# Altium PCB IMU_Board_CG_Rev1c.PcbDoc
Units mil, origin at the board's own origin, x right, y up, seen from the top; angles counter-clockwise.
Board outline 3000 x 2000 mil, 2 copper layers (Top Layer, Bottom Layer); 63 components, 39 nets, 221 pads, 67 vias.
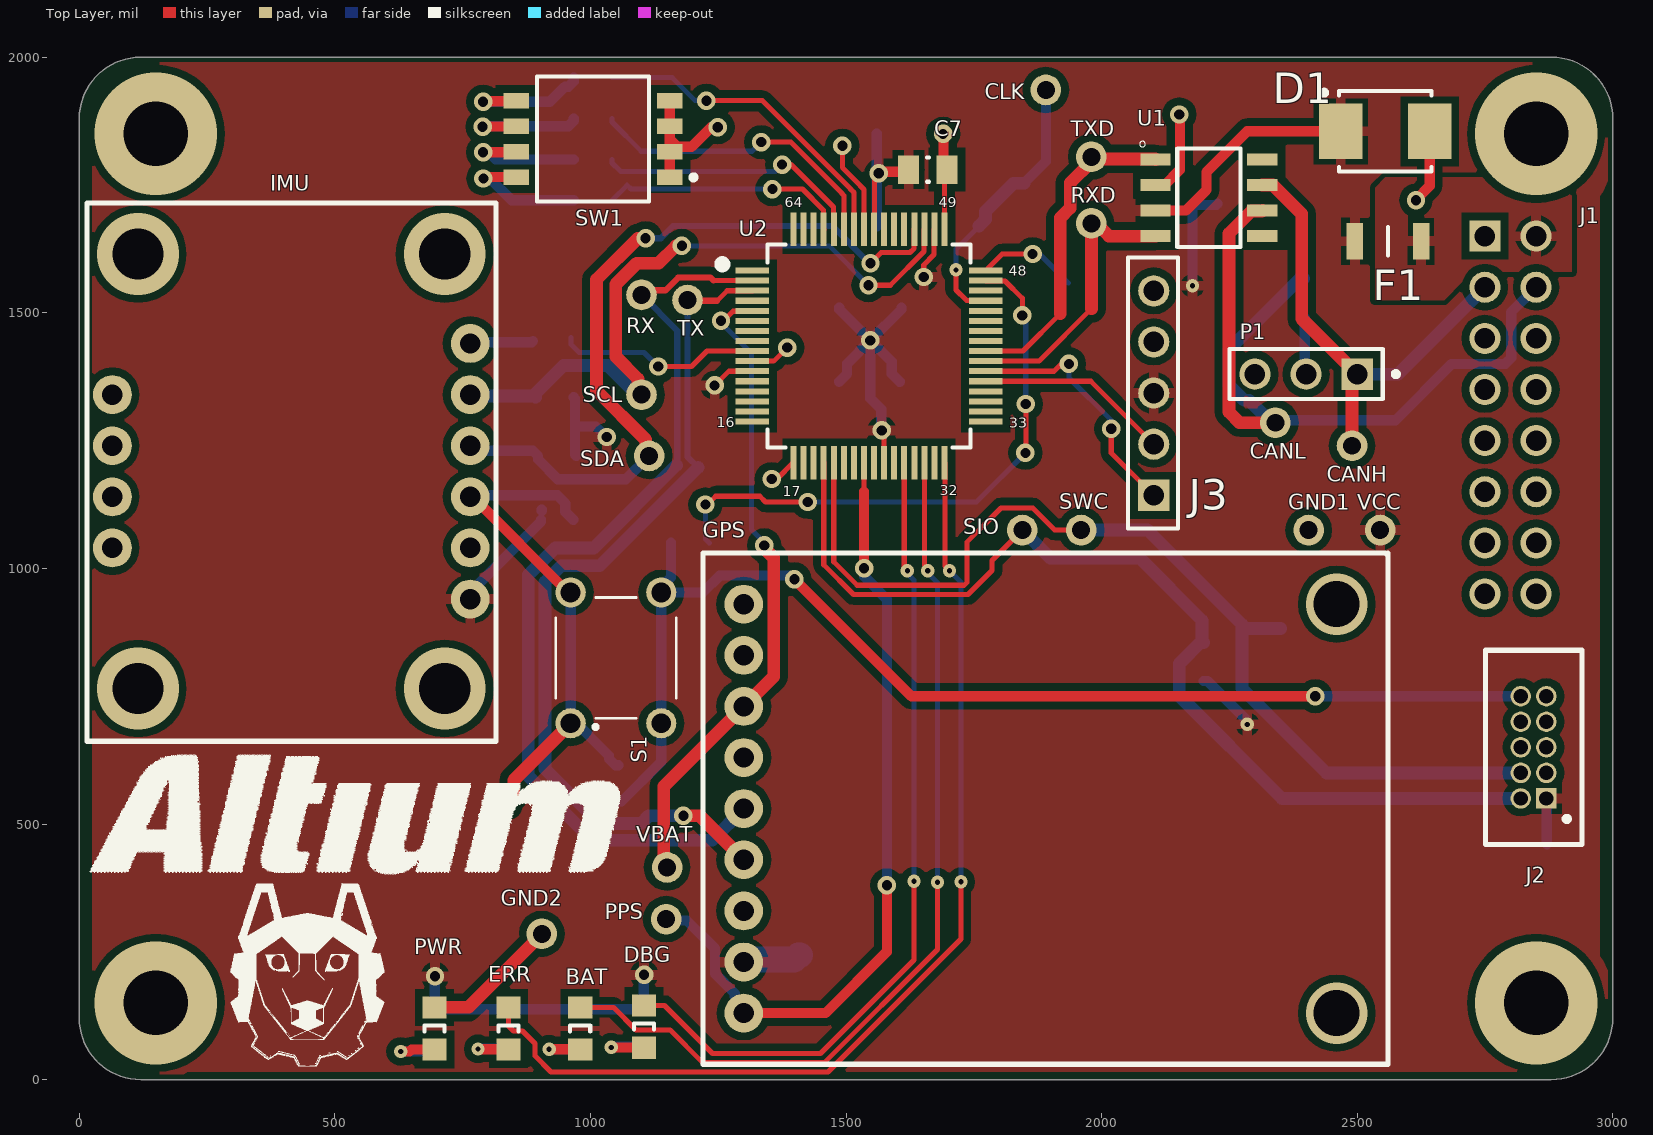
[diagram p0: Top Layer view]
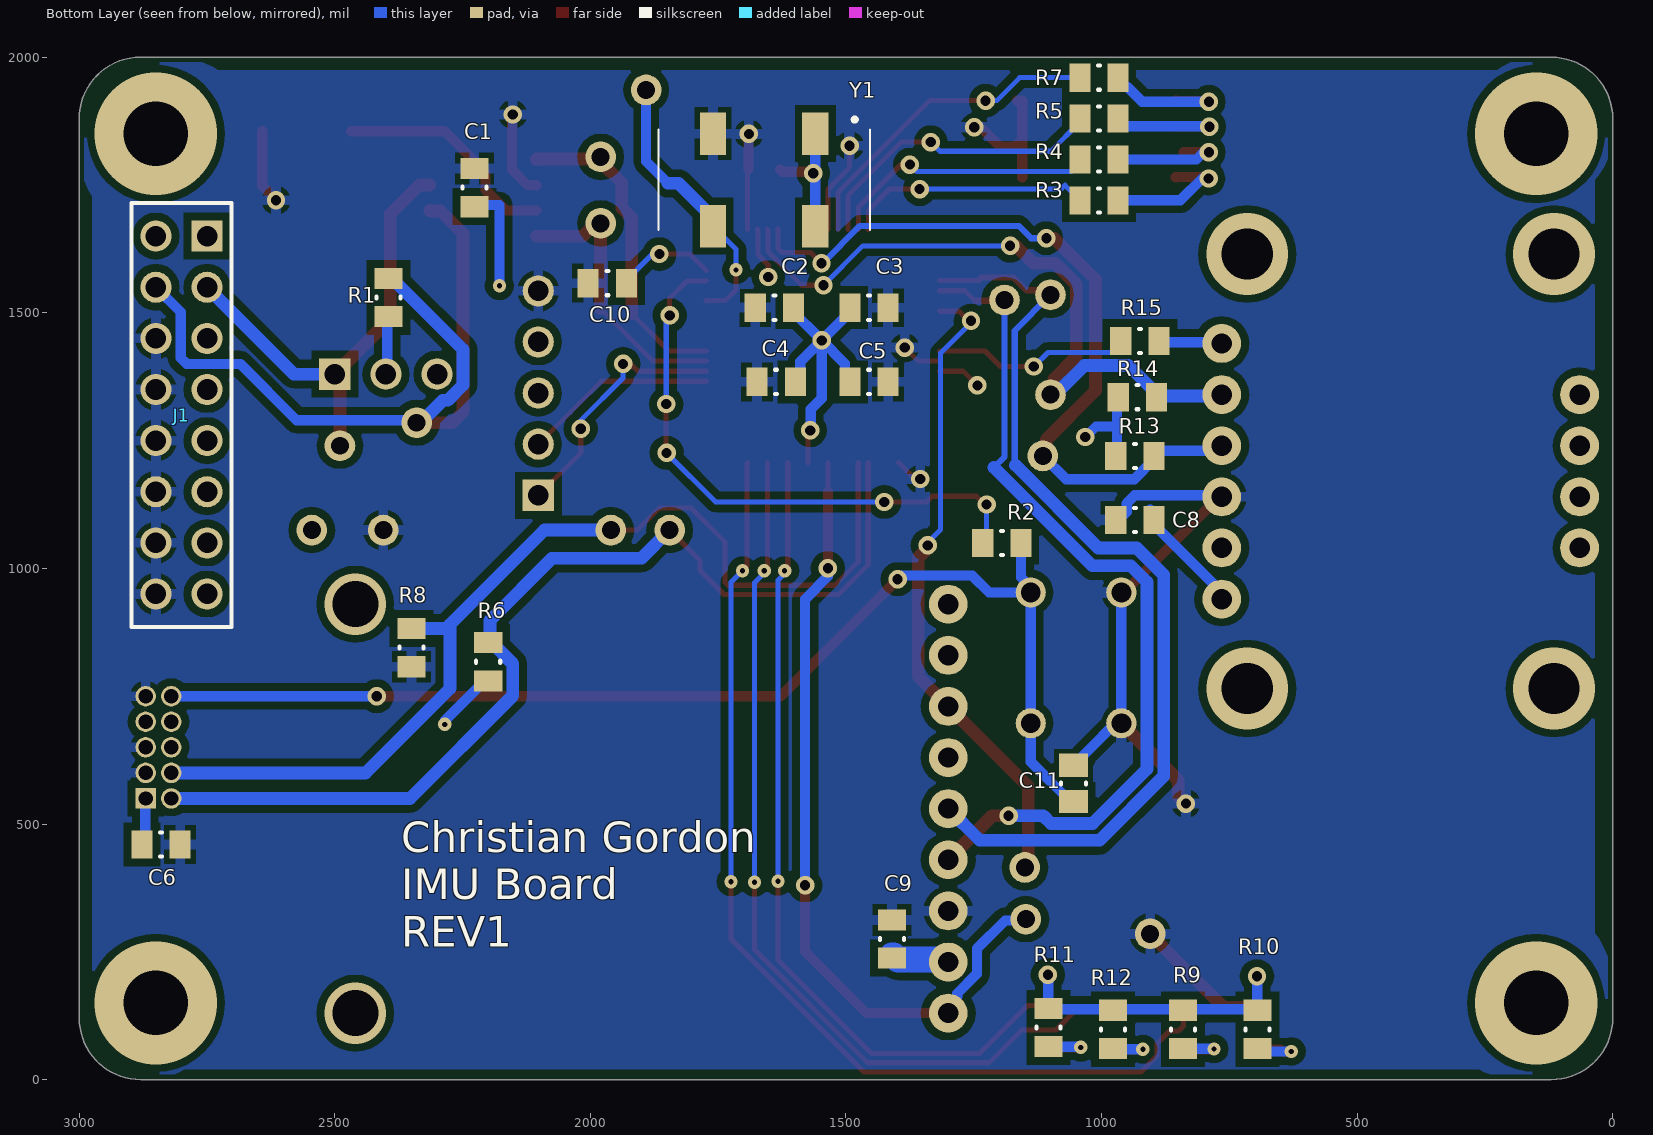
[diagram p1: Bottom Layer view, seen from below]
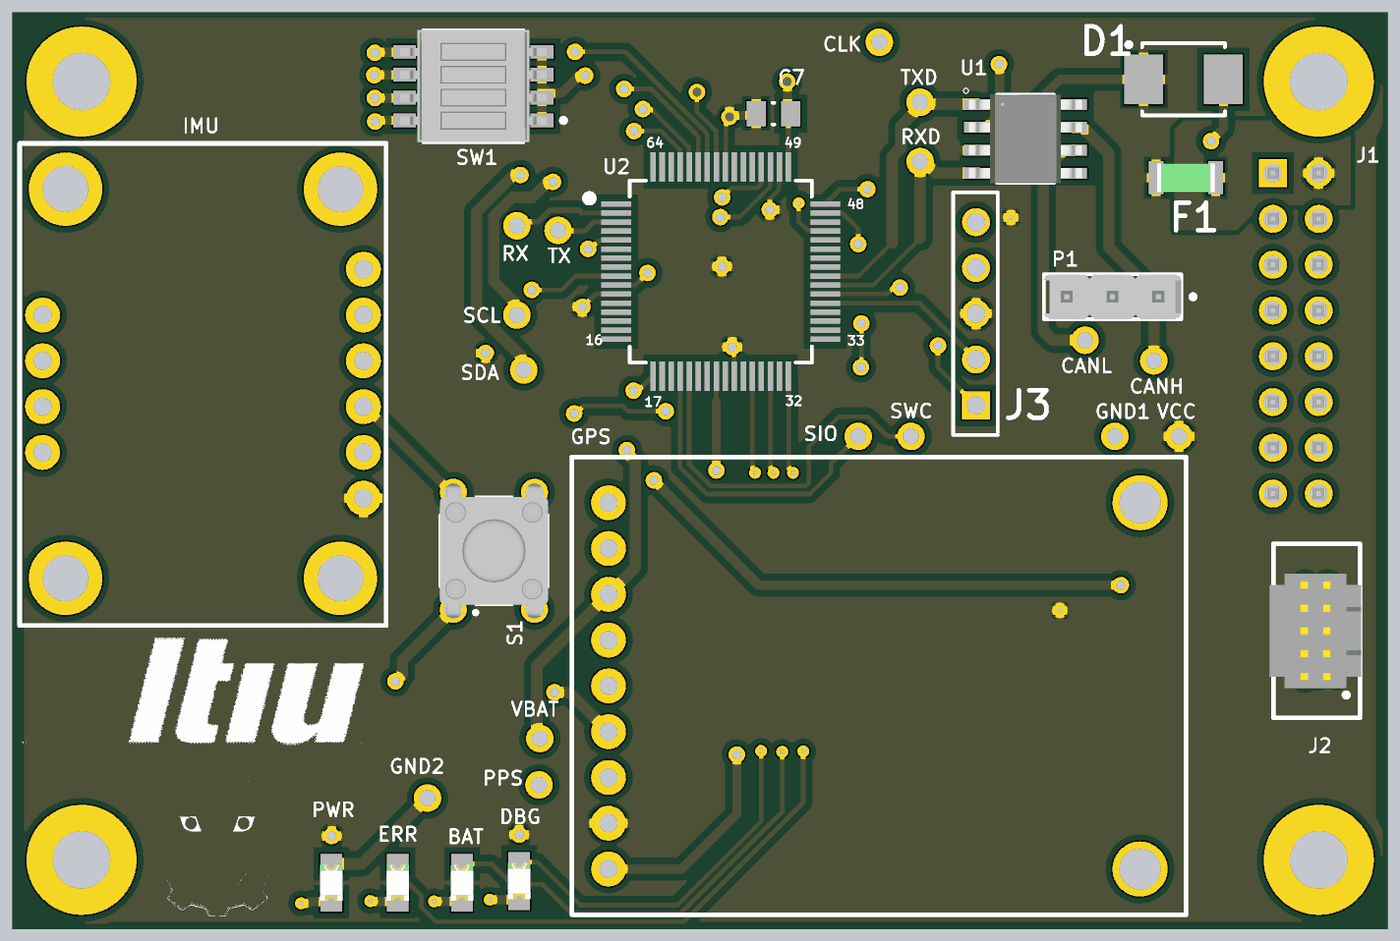
[diagram p2: 3D render of the assembled board from above, using the file's embedded part models]

## Layer stack, top to bottom
Top Solder: solder mask 0.4, Solder Resist, Dk 3.5
Top Layer: signal copper 1.4
Dielectric 1: dielectric 12.6, FR-4, Dk 4.8
Bottom Layer: signal copper 1.4
Bottom Solder: solder mask 0.4, Solder Resist, Dk 3.5

## Board outline
120,0 2880,0 ccw(c2880,120) 3000,120 3000,1880 ccw(c2880,1880) 2880,2000 120,2000 ccw(c120,1880) 0,1880 0,120 ccw(c120,120)

## Design rules (kind name [scope] priority, off if disabled: settings)
BoardOutlineClearance [All] p1: gap=10 ignorepadtopadclearanceinfootprint=FALSE
Clearance [All] p1: gap=5 ignorepadtopadclearanceinfootprint=TRUE except(0: Arc-Hole Track-Hole SMDPad-Hole THPad-Hole Via-Hole Fill-Hole Poly-Hole Region-Hole Text-Hole; 8: Track-Track Track-SMDPad Track-THPad Track-Via; 10: Poly-Poly; 15: Arc-Poly Track-Poly SMDPad-Poly THPad-Poly Via-Poly Fill-Poly)
ComponentClearance [All] p1: gap=0 collisioncheckmode=3 verticalgap=100000 showdistances=FALSE
Height [All] p1: minheight=0 maxheight=2000 prefheight=500
HoleSize [All] p1: absolutevalues=TRUE maxlimit=200 minlimit=10 maxpercent=80.000 minpercent=20.000
MinimumAnnularRing [All] p1: minimumring=6
MinimumSolderMaskSliver [All] p1: minsoldermaskwidth=5
PlaneConnect [All] p1: planeconnectstyle=Relief reliefexpansion=20 reliefentries=4 reliefconductorwidth=20 reliefairgap=10
PolygonConnect [All] p1: connectstyle=Relief reliefconductorwidth=20 reliefentries=4 polygonreliefangle="90 Angle" airgapwidth=10
RoutingVias [All] p1: holewidth=10 width=25 viastyle="Through Hole" minholewidth=10 minwidth=25 maxholewidth=28 maxwidth=50
SilkToSolderMaskClearance [IsPad] p1: minsilkscreentomaskgap=5 clearancetoexposedcopper=TRUE
SolderMaskExpansion [All] p1: expansion=4 istentingtop=FALSE
Width [All] p1: maxlimit=200 minlimit=5 preferedwidth=25 minimp=50.000000 maximp=50.000000 favimp=50.000000
24 further rules are at their usual default settings.

## Classes and differential pairs
component class IMU_Board_MC_CG: BAT C1 C2 C3 C4 C5 C6 C7 C10 C11 CANH CANL CLK D1 DBG ERR F1 GND1 GND2 J1 J2 J3 P1 PWR R1 R2 R3 R4 R5 R6 R7 R8 R9 R10 R11 R12 RXD S1 SIO SW1 SWC TXD U1 U2 VCC Y1
component class IMU_Board_IMU_CG: C8 C9 GPS IMU PPS R13 R14 R15 RX SCL SDA TX VBAT

## Components (designator, comment, footprint, x,y, rotation, side; value= is the part's Value field where it differs from the comment)
1 "Screw Hole" "Screw Hole" 150,150 r90 top
2 "Screw Hole" "Screw Hole" 150,1850 r90 top
3 "Screw Hole" "Screw Hole" 2850,1850 r90 top
4 "Screw Hole" "Screw Hole" 2850,150 r90 top
BAT "LED" 0805_A 980,100 r270 top
C1 "Capacitor 0805" "CAP 0805" 2227,1745 r270 bottom
C2 "Capacitor 0805" "CAP 0805" 1640.12,1510 r0 bottom
C3 "Capacitor 0805" "CAP 0805" 1455.12,1510 r180 bottom
C4 "Capacitor 0805" "CAP 0805" 1636.5,1365 r0 bottom
C5 "Capacitor 0805" "CAP 0805" 1455,1365 r180 bottom
C6 "Capacitor 0805" "CAP 0805" 2840,460 r0 bottom
C7 "Capacitor 0805" "CAP 0805" 1660,1780 r180 top
C8 "Capacitor 0805" "CAP 0805" 935,1095 r180 bottom
C9 "Capacitor 0805" "CAP 0805" 1410,275 r270 bottom
C10 "Capacitor 0805" "CAP 0805" 1967,1558 r0 bottom
C11 ".1uF" CAPC0805(2012)130_N 1055,579.57 r90 bottom value=390pF
CANH "Test Point" "Test Point Through-hole" 2515,1220 r90 top
CANL "Test Point" "Test Point Through-hole" 2365,1265 r90 top
CLK "Test Point" "Test Point Through-hole" 1916,1916 r90 top
D1 "3v3 One" ONSC-SMB-2-403A-03_H_V 2555,1855 r0 top
DBG "LED" 0805_A 1105,103.66 r270 top
ERR "LED" 0805_A 840,100 r270 top
F1 "MF-NSMF012-2" FUSC3216X110N 2560,1640 r180 top
GND1 "Test Point" "Test Point Through-hole" 2430,1055 r90 top
GND2 "Test Point" "Test Point Through-hole" 930,265 r90 top
GPS "MTK3339 Breakout" "MTK3339 Breakout" 1220,1030 r270 top
IMU "BNO055 Breakout" "BNO055 Breakout" 815,660 r90 top
J1 "Stacking Header" SMTC-SSQ-108-02-X-D 2750,1650 r270 bottom
J2 "Programming Header" programming3D 2961.77,454.72 r90 top
J3 "UART Debuging Header" "UART DEBUGGING HEADER" 2152,1073 r90 top
P1 "Jumper" MOLX-22-28-4033_V 2400,1380 r180 top
PPS "Test Point" "Test Point Through-hole" 1173.25,293.84 r90 top
PWR "LED" 0805_A 695,100 r270 top
R1 "120R" RESC0805(2012)_N 2395,1530 r270 bottom value="120.00 Ohm"
R2 "120R" RESC0805(2012)_N 1195,1050 r180 bottom value=100
R3 "120R" RESC0805(2012)_N 1005,1720 r180 bottom value="120.00 Ohm"
R4 "120R" RESC0805(2012)_N 1005,1800 r180 bottom value="120.00 Ohm"
R5 "120R" RESC0805(2012)_N 1005,1880 r180 bottom value="120.00 Ohm"
R6 "120R" RESC0805(2012)_N 2200,817.4 r270 bottom value=47k
R7 "120R" RESC0805(2012)_N 1005,1960 r180 bottom value="120.00 Ohm"
R8 "120R" RESC0805(2012)_N 2350,845 r90 bottom value=47k
R9 "120R" RESC0805(2012)_N 840.79,98.35 r90 bottom value="120.00 Ohm"
R10 "120R" RESC0805(2012)_N 695,98.35 r90 bottom value="120.00 Ohm"
R11 "120R" RESC0805(2012)_N 1103.68,102.01 r90 bottom value="120.00 Ohm"
R12 "120R" RESC0805(2012)_N 977.89,98.35 r90 bottom value="120.00 Ohm"
R13 "120R" RESC0805(2012)_N 935,1220 r0 bottom value=4.7k
R14 "120R" RESC0805(2012)_N 930,1335 r0 bottom value=4.7k
R15 "120R" RESC0805(2012)_N 925,1445 r180 bottom value="120.00 Ohm"
RX "Test Point" "Test Point Through-hole" 1080,1510 r0 top
RXD "Test Point" "Test Point Through-hole" 2005,1655 r90 top
S1 "1825910-7" "Switch 6mm 24V (NO)" 1050,825 r90 top
SCL "Test Point" "Test Point Through-hole" 1125,1320 r90 top
SDA "Test Point" "Test Point Through-hole" 1140,1200 r90 top
SIO "Test Point" "Test Point Through-hole" 1870,1055 r90 top
SW1 "TDA04H0SB1" CKCP-TDA04H0SB1R_V 1005,1840 r180 top
SWC "Test Point" "Test Point Through-hole" 1985,1055 r90 top
TX "Test Point" "Test Point Through-hole" 1170,1500 r0 top
TXD "Test Point" "Test Point Through-hole" 2005,1785 r90 top
U1 "3V3 Can TXRX" SOIC127P600X175-8N 2210,1725 r0 top
U2 "CY8C4248AZI-L485" TQFP50P1200X1200X160-64N 1545,1435 r0 top
VBAT "Test Point" "Test Point Through-hole" 1175,395 r90 top
VCC "Test Point" "Test Point Through-hole" 2570,1055 r90 top
Y1 "SG-636PCW_50.0000MC3__ROHS" SG-636_3D 1660,1760 r0 bottom

## Footprints (in the part's own frame and the unit in brackets; to place one, negate y for a bottom-side part, rotate by r counter-clockwise, add the part's x,y. Pads: shape width x height; smd on the part's side, far side on the other; paste and mask are expansions set on the pad)
0805_A [mm] "Chip LED, 2-Leads, Body 2.0x1.3mm, IPC Medium Density"
  rect 1.1x1.2 smd: 1(-1.05,0) 2(1.05,0)
  silkscreen extent -0.15,-0.5 0.15,0.5, body extent -1,-0.62 1,0.63, height 0.68
"BNO055 Breakout" [mil]
  round 76 hole 40: 1(280,50) 2(380,50) 3(480,50) 4(580,50) 5(680,50) 6(780,50) 7(680,750) 8(580,750) 9(480,750) 10(380,750)
  silkscreen extent 2,0 1055,800
"CAP 0805" [mm]
  rect 1.05x1.4 smd: 1(-0.95,0) 2(0.95,0)
  silkscreen extent -0.05,-0.6 0.05,0.6, body extent -1.1,-0.67 1.1,0.68, height 0.7
CAPC0805(2012)130_N [mm] "Chip Capacitor, Body 2.0x1.2mm, Height 1.3mm, IPC Medium Density"
  rect 1.15x1.45 smd: 1(-0.9,0) 2(0.9,0)
  silkscreen extent -0.05,-0.62 0.05,0.63, body extent -1.1,-0.72 1.1,0.73, height 1.3
CKCP-TDA04H0SB1R_V [mm] "SMD, 8-Leads, Body 6.21x6.2mm, Pitch 1.27mm"
  rect 1.27x0.76 smd: 1(-3.81,1.905) 2(-3.81,0.635) 3(-3.81,-0.635) 4(-3.81,-1.905) 5(3.81,-1.905) 6(3.81,-0.635) 7(3.81,0.635) 8(3.81,1.905)
  silkscreen extent -5.12,-3.11 2.78,3.11, body extent -4.06,-3.1 4.06,3.11, height 2.3
FUSC3216X110N [mm]
  rect 0.82x1.82 smd: 1(-1.65,0) 2(1.65,0)
  silkscreen extent 0,-0.7 0,0.7, body extent -1.6,-0.8 1.6,0.8, height 1.1
MOLX-22-28-4033_V [mm] "THD, 3-Leads, Body 7.62x2.49mm, Pitch 2.54mm"
  rect 1.55x1.55 hole 1.02: 1(-2.54,0)
  round 1.55 hole 1.02: 2(0,0) 3(2.54,0)
  silkscreen extent -4.59,-1.24 3.81,1.24, body extent -3.81,-1.24 3.81,1.24, height 8.38
"MTK3339 Breakout" [mil]
  round 76 hole 39.37: 1(100,80) 2(200,80) 3(300,80) 4(400,80) 5(500,80) 6(600,80) 7(700,80) 8(800,80) 9(900,80)
  silkscreen extent 0,0 1000,1340
ONSC-SMB-2-403A-03_H_V [mil] "Molded, 2-Leads, Body 4.6x3.95mm"
  rect 85x107.99 smd: 1(-87.01,0) 2(87.01,0)
  silkscreen extent -125,-79 91,81, body extent -91,-78 91,78, height 95
programming3D [mil]
  rect 40x40 hole 28 mask+3: 1(95.28,91.77)
  round 40 hole 28 mask+3: 2(95.28,141.77) 3(145.28,91.77) 4(145.28,141.77) 5(195.28,91.77) 6(195.28,141.77) 7(245.28,91.77) 8(245.28,141.77) 9(295.28,91.77) 10(295.28,141.77)
  silkscreen extent 5,22 385,211, body extent 70,19 320,219, height 226
RESC0805(2012)_N [mm] "Chip Resistor, Body 2.0x1.3mm, IPC Medium Density"
  rect 1.05x1.4 smd: 1(-0.95,0) 2(0.95,0)
  silkscreen extent -0.05,-0.6 0.05,0.6, body extent -1.1,-0.67 1.1,0.68, height 0.7
"Screw Hole" [mil]
SG-636_3D [mm]
  rect 1.3x2.1 smd: 1(-2.54,-2.3) 2(2.54,-2.3) 3(2.54,2.3) 4(-2.54,2.3)
  silkscreen extent -5.25,-3.1 5.25,2.5, body extent -5.25,-3.22 5.25,3.22, height 2.8
SMTC-SSQ-108-02-X-D [mm] "SQ Post Socket, 2x8 Pins, Vertical, 2.54mm Pitch, Female"
  rect 1.55x1.55 hole 1.02: 1(0,0)
  round 1.55 hole 1.02: 2(0,-2.54) 3(2.54,0) 4(2.54,-2.54) 5(5.08,0) 6(5.08,-2.54) 7(7.62,0) 8(7.62,-2.54) 9(10.16,0) 10(10.16,-2.54) 11(12.7,0) 12(12.7,-2.54) 13(15.24,0) 14(15.24,-2.54) 15(17.78,0) 16(17.78,-2.54)
  silkscreen extent -1.65,-3.74 19.43,1.2, body extent -1.52,-3.75 19.3,1.21, height 8.51
SOIC127P600X175-8N [mm]
  rect 1.5x0.6 smd: 1(-2.65,1.905) 2(-2.65,0.635) 3(-2.65,-0.635) 4(-2.65,-1.905) 5(2.65,-1.905) 6(2.65,-0.635) 7(2.65,0.635) 8(2.65,1.905)
  silkscreen extent -3.44,-2.45 1.58,2.81, body extent -3.12,-2.45 3.13,2.45, height 1.76
"Switch 6mm 24V (NO)" [mm]
  round 1.498 hole 0.99: 1a(-3.25,2.25) 1b(3.25,2.25) 2a(-3.25,-2.25) 2b(3.25,-2.25)
  silkscreen extent -3.53,-3 3,3, body extent -3.9,-2.99 3.9,3, height 5.01
"Test Point Through-hole" [mil]
  round 60 hole 35: 1(20,25)
TQFP50P1200X1200X160-64N [mm]
  rect 1.65x0.3 smd mask+0: 1(-5.801,3.75) 2(-5.801,3.25) 3(-5.801,2.75) 4(-5.801,2.25) 5(-5.801,1.75) 6(-5.801,1.25) 7(-5.801,0.75) 8(-5.801,0.25) 9(-5.801,-0.25) 10(-5.801,-0.75) 11(-5.801,-1.25) 12(-5.801,-1.75) 13(-5.801,-2.25) 14(-5.801,-2.75) 15(-5.801,-3.25) 16(-5.801,-3.75) 33(5.801,-3.75) 34(5.801,-3.25) 35(5.801,-2.75) 36(5.801,-2.25) 37(5.801,-1.75) 38(5.801,-1.25) 39(5.801,-0.75) 40(5.801,-0.25) 41(5.801,0.25) 42(5.801,0.75) 43(5.801,1.25) 44(5.801,1.75) 45(5.801,2.25) 46(5.801,2.75) 47(5.801,3.25) 48(5.801,3.75)
  rect 0.3x1.65 smd mask+0: 17(-3.75,-5.801) 18(-3.25,-5.801) 19(-2.75,-5.801) 20(-2.25,-5.801) 21(-1.75,-5.801) 22(-1.25,-5.801) 23(-0.75,-5.801) 24(-0.25,-5.801) 25(0.25,-5.801) 26(0.75,-5.801) 27(1.25,-5.801) 28(1.75,-5.801) 29(2.25,-5.801) 30(2.75,-5.801) 31(3.25,-5.801) 32(3.75,-5.801) 49(3.75,5.801) 50(3.25,5.801) 51(2.75,5.801) 52(2.25,5.801) 53(1.75,5.801) 54(1.25,5.801) 55(0.75,5.801) 56(0.25,5.801) 57(-0.25,5.801) 58(-0.75,5.801) 59(-1.25,5.801) 60(-1.75,5.801) 61(-2.25,5.801) 62(-2.75,5.801) 63(-3.25,5.801) 64(-3.75,5.801)
  silkscreen extent -7.49,-5.05 5.05,5.05, body extent -5.12,-5.12 5.12,5.12, height 1.6
"UART DEBUGGING HEADER" [mm]
  rect 1.55x1.55 hole 1.02: 1(1.778,1.27)
  round 1.55 hole 1.02: 2(4.318,1.27) 3(6.858,1.27) 4(9.398,1.27) 5(11.938,1.27)
  silkscreen extent 0.13,0.07 13.59,2.54

## Part data
1 2 3 4: "Add 4 of these to your design for screw hole mounting"
BAT DBG ERR PWR: "Standard 0805 LED", Color="Super Red", Manufacturer="Wuerth Elektronik", PartNumber=150080SS75000, ComponentLink1Description="Manufacturer URL", ComponentLink1URL=http://www.we-online.com, ComponentLink2Description=Datasheet, ComponentLink2URL=http://katalog.we-online.com/led/datasheet/150080SS75000.pdf, PackageReference=0805_A
C1 C4 C5 C6 C7 C8 C9: "Standard Capacitor", Capacitance=.1µF, Case Size/Dimension=0805, Dielectric=X5R, Manufacturer=AVX, Package Description="2-Pin Surface Mount Device, Body 2.01 x 1.25 mm", Rated Voltage=10V, Tolerance (%)=±10%, Datasheet URL=http://datasheets.avx.com/cx5r.pdf, Datasheet Version=05/2016, Manufacturer URL=http://www.avx.com/, Mounting Technology=SurfaceMount, Package Reference=0805
C2 C3: "Standard Capacitor", Capacitance=10µF, Case Size/Dimension=0805, Dielectric=X5R, Manufacturer=AVX, Package Description="2-Pin Surface Mount Device, Body 2.01 x 1.25 mm", Rated Voltage=10V, Tolerance (%)=±10%, Datasheet URL=http://datasheets.avx.com/cx5r.pdf, Datasheet Version=05/2016, Manufacturer URL=http://www.avx.com/, Mounting Technology=SurfaceMount, Package Reference=0805
C10: "Standard Capacitor", Capacitance=1µF, Case Size/Dimension=0805, Dielectric=X5R, Manufacturer=AVX, Package Description="2-Pin Surface Mount Device, Body 2.01 x 1.25 mm", Rated Voltage=10V, Tolerance (%)=±10%, Datasheet URL=http://datasheets.avx.com/cx5r.pdf, Datasheet Version=05/2016, Manufacturer URL=http://www.avx.com/, Mounting Technology=SurfaceMount, Package Reference=0805
C11: library part CMP-1036-02603-1, "CAP 390pF 200V ±5% 0805 (2012 Metric) Thickness 1.3mm SMD", Case-EIA=0805, Case-Metric=2012, Rated Voltage="200 V", Tolerance=Â±5%, Max Thickness="1.3 mm", Technology=SMT
D1: library part "Zener Diode 5.1V", "3 W Zener Voltage Regulator, 2-Pin SMB, Pb-Free, Tape and Reel", Manufacturer="On Semiconductor", PartNumber=1SMB5917BT3G, ComponentLink1Description="Manufacturer URL", ComponentLink1URL=http://www.onsemi.com/, ComponentLink2Description=Datasheet, ComponentLink2URL=http://www.onsemi.com/pub_link/Collateral/1SMB5913BT3-D.PDF, ComponentLink3Description="Package Specification", ComponentLink3URL=http://www.onsemi.com/pub_link/Collateral/1SMB5913BT3-D.PDF, DatasheetVersion="Rev. 8", Mounting Technology="Surface Mount", PackageDescription="2-Pin Small Molded Package, J-Bend Lead, Body 4.33 x 3.625 mm", PackageReference=SMB-2-403A-03_H, PackageVersion="Rev. H, 05/2011", Packing="Tape and Reel", RoHS=Pb-Free, VZ Typ (V)=4.7
F1: "Fuse", Manufacturer_Name=Bourns, Mouser Part Number=652-MF-NSMF012-2, Arrow Part Number=MF-NSMF012-2, Arrow Price/Stock=https://www.arrow.com/en/products/mf-nsmf012-2/bourns, Datasheet Link=https://componentsearchengine.com/Datasheets/2/MF-NSMF012-2.pdf, Height=1.1mm, Manufacturer_Part_Number=MF-NSMF012-2, Mouser Price/Stock=https://www.mouser.co.uk/ProductDetail/Bourns/MF-NSMF012-2?qs=lKPmECyLdCz9%2F1W04eWwOg%3D%3D
J1: "SQ Post Socket, Through-hole, Vertical, -55 to 125 degC, 2.54 mm Pitch, 16-Pin, Female, RoHS", Manufacturer=Samtec, PartNumber=SSQ-108-02-G-D, Temperature Range="-55 to 125 degC", ComponentLink1Description="Manufacturer URL", ComponentLink1URL=http://www.samtec.com, ComponentLink2Description=Datasheet, ComponentLink2URL=http://www.samtec.com/documents/webfiles/pdf/SSQ_TH.PDF, ComponentLink3Description="Package Specification", ComponentLink3URL=http://www.samtec.com/documents/webfiles/cpdf/SSQ-1XX-XX-XXX-X-XX-XXX-XX-X-MKT.pdf, DatasheetVersion=F-214, Mounting Technology=Through-hole, Orientation=Vertical, PackageDescription="Assembly, Socket Strip .025[0.64] SQ Tail", PackageReference=SSQ-108-02-X-D, PackageVersion="BD, 6/1987", Pitch="2.54 mm", RoHS=True
P1: library part CMP-1676-00001-5, "Male Header, Pitch 2.54 mm, 1 x 3 Position, Height 8.38 mm, Tail Length 3.18 mm, RoHS, Bulk", Colour=Black, Current Rating="4 A", Manufacturer=Molex, Max Operating Temperature="75 degC", Min Operating Temperature="0 degC", Package Quantity=1, Voltage Rating="250 V", ComponentLink1Description="Manufacturer URL", ComponentLink1URL=http://www.molex.com/, ComponentLink2Description=Datasheet, ComponentLink2URL=http://www.molex.com/pdm_docs/sd/022284033_sd.pdf, Contact Finish=Gold, Contact Material=Brass, Contact Plating=Gold, DatasheetVersion="Rev. G, 01/2012", Height="8.38 mm", Lead Pitch="0.1 inch", Length="7.62 mm", Mount="Through Hole", Mounting Technology="Through Hole", PackageDescription="Male Header, Pitch 2.54 mm, 1 x 3 Position, Height 8.38 mm, Tail Length 3.18 mm", PackageReference=22-28-4033, Packaging=Bulk, Pins=3, REACH SVHC=Unknown, RoHSCompliant=true, Rows=1
R1 R2 R3 R4 R5 R6 R7 R8 R9 R10 R11 R12 R13 R14 R15: library part "Resistor 0805", "Generic 0805 Resistor", Case-EIA=0805, Case-Metric=2012, Power="0.125 W", Tolerance="5 %", Technology=SMT
S1: library part "Switch 6mm 24V (NO)", "FSM4JAH=6MM TACT SWITCH, HIGH TEMP", Contact_Current_Rating="50 mA", Package=None, Configuration_Pole-Throw="Single Pole - Single Throw", Digi-Key_Part_Number=450-1804-ND, Digi-Key_Purchase_URL=https://www.digikey.com/product-detail/en/te-connectivity-alcoswitch-switches/1825910-7/450-1804-ND/1731414?utm_source=snapeda&utm_medium=aggregator&utm_campaign=symbol, EU_RoHS_Compliance=Compliant, MF="TE Connectivity", MP=1825910-7, SnapEDA_Link=https://www.snapeda.com/parts/1825910-7/TE%20Connectivity%20ALCOSWITCH%20Switches/view-part/?ref=snap, TE_purchase_URL=https://www.te.com/usa-en/product-1825910-7.html?te_bu=Cor&te_type=disp&te_campaign=seda_glo_cor-seda-global-disp-prtnr-fy19-seda-model-bom-cta_sma-317_1&elqCampaignId=32493
SW1: library part "Dip Switch Array SMD Half-Pitch", "Ultra-Miniature Surface Mount Half-Pitch DIP Switch, 25 mA, 24 V, -40 to 85 degC, 8-Pin SMD, RoHS, Tube", Case\Package=DIP, Contact Current Rating="100 mA", Max Contact Resistance="100 mohm", Max Current Rating="25 mA", Max Operating Temperature="85 degC", Max Voltage Rating (DC)="24 V", Min Operating Temperature="-40 degC", Package Quantity=70, ComponentLink1Description=Datasheet, ComponentLink1URL=http://www.ck-components.com/media/1328/tda.pdf, Contact Finish=Gold, Contact Material=Copper, Contact Plating=Gold, Current Rating="100 mA", DatasheetVersion=02/2016, Height="2.3 mm", Lead Pitch="1.27 mm", Length="6.21 mm", Mount="Surface Mount", Mounting Technology="Surface Mount", PackageDescription="8-Pin Surface Mount Device, Body 6.21 x 6.2 mm, Pitch 1.27 mm", PackageReference=TDA04H0SB1R, Packaging=Rail/Tube, Pins=4, Radiation Hardening=No, REACH SVHC="No SVHC", RoHSCompliant=true, Throw Configuration=SPST, Voltage Rating (DC)="24 V"
U1: library part "CAN Tranceiver", "Microchip MCP2562-E/SN, CAN Transceiver 1MBps 1-channel IEC 61000-4-2, 8-Pin SOIC", Package="SO-8 Microchip", Availability=Unavailable, MF=Microchip, MP=MCP2562-E/SN, Price=None, SnapEDA_Link=https://www.snapeda.com/parts/MCP2562-E/SN/Microchip/view-part/?ref=snap
U2: library part "PSOC MC", "64 pin psoc", Part_Number=CY8C4248AZI-L485
Y1: library part Oscilator, "Standard Clock Oscillators", Arrow Part Number="SG-636PCW 50.0000MC3: ROHS", Manufacturer_Name="Epson Timing", Datasheet Link=http://www.mouser.com/ds/2/137/G-636PCE_en-1003252.pdf, Manufacturer_Part_Number="SG-636PCW 50.0000MC3: ROHS"

## Via types
v1: diameter 36, hole 20, Top Layer to Bottom Layer, 44 vias
v2: diameter 26, hole 10, Top Layer to Bottom Layer, 13 vias
v3: diameter 240, hole 126, Top Layer to Bottom Layer, 4 vias
v4: diameter 160, hole 100, Top Layer to Bottom Layer, 4 vias
v5: diameter 120, hole 90, Top Layer to Bottom Layer, 2 vias

## Nets (pads, with @x,y where several pads share a name; then routed paths per layer and width w, separated by ;. In a path a pad name is that pad's centre, name@x,y a point inside that pad or via, vN(x,y) a via of type N, cw(c..) or ccw(c..) an arc to the next point about the centre after c; other vN are vias at no path point)
"BAT STAT": BAT.1 U2.30 | length 1798.4
  Top Layer w10: BAT.1 1045,141.34 1089.36,96.98 1156.02,96.98 1220,33 1457.46,33 1679,254.54 v2(1679,386) ; U2.30 1653.27,1005.79 1660,999.06 v2(1660,995.5)
  Bottom Layer w10: v2(1660,995.5) 1660,990.94 1679,971.94 v2(1679,386)
CANH: CANH.1 J1.3 P1.1 U1.7 | length 915.9
  Top Layer w25: U1.7 2334.66,1750 2352.35,1732.31 2391.5,1693.16 2391.5,1488.5 P1.1 2490,1370 2490,1252.14 CANH.1@2486.7,1248.84
  Bottom Layer w25: P1.1 2580,1380 J1.3
CANL: CANL.1 J1.4 R1.1 U1.6 | length 1599.7
  Top Layer w25: U1.6 2313.64,1699.31 2293.31,1699.31 2248.99,1654.99 2248.99,1306.01 2270,1285 CANL.1
  Bottom Layer w20: CANL.1 2345,1290 2575,1290 2685,1400 2789.77,1400 2801.49,1411.72 2801.49,1501.49 J1.4
  Bottom Layer w25: CANL.1 2332.52,1285 2288.53,1328.99 2278.87,1328.99 2248.99,1358.87 2248.99,1428.28 2388.11,1567.4 R1.1
CANL1: P1.2 R1.2 | length 114.7
  Bottom Layer w20: R1.2 2397.5,1490.1 2397.5,1382.5 P1.2
CLK: CLK.1 U2.45 Y1.3 | length 542.8
  Top Layer w10: v2(1715,1584) 1715,1544.88 1735.51,1524.36 1772.6,1524.36 U2.45
  Bottom Layer w10: v2(1715,1584) 1715,1624.45 Y1.3
  Bottom Layer w20: 1848.3,1753.3 1891,1796 CLK.1
  Bottom Layer w25: Y1.3@1760,1670 1773.09,1683.09 1773.09,1698.84 1827.56,1753.3 1848.3,1753.3
DBG: DBG.1 U2.28 | length 1623.4
  Top Layer w10: DBG.1 1145,145 1239,51 1450,51 1633,234 v2(1633,388) ; U2.28 1613.9,1001.36 1619.76,995.5 v2(1620,995.5)
  Bottom Layer w10: v2(1620,995.5) 1620,990 1633,977 v2(1633,388)
DBG_RX: J3.2 U2.37 | length 379.6
  Top Layer w10: U2.37 1978.9,1366.1 J3.2
DBG_TX: J3.1 U2.38 | length 494.3
  Top Layer w10: U2.38 1907.13,1385.79 1921.34,1400 v1(1936,1400) ; v1(2019,1273) 2019,1226 J3.1
  Bottom Layer w10: v1(1936,1400) 1936,1372.6 2019,1289.6 v1(2019,1273)
DIP1: R7.1 U2.58 | length 638.5
  Top Layer w10: v1(1227,1915) 1336.54,1915 1509.22,1742.33 1509.22,1741.63 1515.47,1735.37 U2.58
  Bottom Layer w10: R7.1 1160,1960 1205,1915 v1(1227,1915)
DIP2: R5.1 U2.59 | length 601.3
  Top Layer w10: v1(1334,1834) 1392.09,1834 1491.22,1734.87 1491.22,1734.17 1495.79,1729.6 U2.59
  Bottom Layer w10: R5.1 1042.4,1873.11 1099.51,1816 1316,1816 v1(1334,1834)
DIP3: R4.1 U2.60 | length 530.4
  Top Layer w10: v1(1375,1790) 1392.34,1790 1475.32,1707.01 1475.32,1664.16 U2.60
  Bottom Layer w10: R4.1 1042.4,1793.11 1058.76,1776.75 1361.75,1776.75 v1(1375,1790)
DIP4: R3.1 U2.61 | length 483.6
  Top Layer w10: v1(1356,1742) 1414.88,1742 1455.64,1701.24 1455.64,1664.16 U2.61
  Bottom Layer w10: R3.1 1071.9,1749.5 1079.4,1742 v1(1356,1742)
ERR: ERR.1 U2.32 | length 2025.8
  Top Layer w10: ERR.1 840,104.69 849.49,95.19 867.13,95.19 891.5,70.82 891.5,46.44 922.94,15 1464.91,15 1725,275.09 v2(1725,387) ; U2.32 1693.54,1205.72 1693.54,1004.46 v2(1702.65,995.35)
  Bottom Layer w10: v2(1702.65,995.35) 1725,973 v2(1725,387)
GND: C1.1 C2.2 C3.2 C4.2 C5.2 C6.1 C7.1 C8.1 C9.1 C10.2 C11.2 D1.2 GND1.1 GND2.1 GPS.7 IMU.3 J1.6 J1.8 J1.10 J1.12 J1.14 J1.16 J2.3 J2.5 J2.9 J3.5 PWR.1 R8.1 S1.1a S1.1b SW1.1 SW1.2 SW1.3 SW1.4 U1.2 U2.10 U2.17 U2.49 U2.57 Y1.2 | length 2463.5
  Top Layer w10: U2.10 1358.47,1405.47 v1(1385,1432) ; v1(1354.61,1174.85) 1364.83,1174.85 1396.98,1207 U2.17 ; v1(1493,1827) 1493,1784 1527.22,1749.78 1527.22,1749.08 1535.16,1741.14 U2.57 ; C7.1@1690.75,1780.75 1691.5,1780 1692.64,1778.86 U2.49
  Top Layer w20: IMU.3 769.69,1140 956.73,952.95 S1.1b ; GND2.1 GND2.1@907.18,285 ; SW1.1 SW1.2 1155,1840 ; SW1.4@1165.04,1915 SW1.4 SW1.3 1155,1840 ; v1(1249.07,1863.04) 1236.04,1863.04 1198,1825 1170,1825 1155,1840 ; v1(1690,1850) 1690.75,1849.25 C7.1@1690.75,1780.75 ; U1.2@2105.29,1749.62 U1.2 2123.39,1750 2153.2,1779.81 2153.2,1885.45 2152,1886.65 v1(2152,1888) ; v1(2615,1720) 2615,1721.35 2642.01,1748.36 D1.2
  Top Layer w25: PWR.1 761.34,141.34 GND2.1 ; v1(835,540) 835.36,540 850,554.64 850,585.63 S1.1a
  Bottom Layer w20: IMU.3 768,1143 935.09,1143 950.91,1127.19 950.91,1110.59 C8.1@966.5,1095 ; S1.1b 961.42,708.58 1036.46,633.54 1036.46,627.64 1049.09,615 C11.2
IMU_RST: R15.1 U2.9 | length 398.3
  Top Layer w10: v1(1132.5,1395) 1197.77,1395 1227.93,1425.16 U2.9
  Bottom Layer w10: R15.1@962.4,1451.89 R15.1 962.4,1438.11 978.07,1422.44 1105.06,1422.44 v1(1132.5,1395)
NetBAT_2: BAT.2 R12.1 | length 122.1
  Top Layer w20: v2(919.33,59.33) 979.33,59.33 BAT.2
  Bottom Layer w20: v2(919.33,59.33) 971.62,59.33 973.95,57 R12.1
NetC10_1: C10.1 U2.48 | length 199.1
  Top Layer w10: U2.48 1805.74,1615 v1(1865,1615)
  Bottom Layer w10: v1(1865,1615) 1878.5,1615 C10.1@1935.5,1558
NetDBG_2: DBG.2 R11.1 | length 128
  Top Layer w20: v2(1040.67,62.99) 1104.33,62.99 DBG.2
  Bottom Layer w20: v2@1040.47,64.13 1103.21,64.13 R11.1
NetERR_2: ERR.2 R9.1 | length 121.7
  Top Layer w20: v2(780,60) 780.67,59.33 839.33,59.33 ERR.2
  Bottom Layer w20: v2(780,60) 780.47,60.47 840.32,60.47 R9.1
NetIMU_6: IMU.6 R15.2 | length 124.7
  Bottom Layer w20: IMU.6 767.5,1442.5 885.1,1442.5 R15.2
NetPWR_2: PWR.2 R10.1 | length 136
  Top Layer w20: v2(629,55) 646.35,55 650.01,58.66 PWR.2
  Bottom Layer w20: v2(629,55) 689.06,55 R10.1
NetR3_2: R3.2 SW1.8 | length 260.2
  Top Layer w20: v1(790.75,1762.75) 793.5,1765.5 854.5,1765.5 SW1.8
  Bottom Layer w20: v1(790.75,1762.75) 803.25,1762.75 846,1720 R3.2
NetR4_2: R4.2 SW1.7 | length 233.4
  Top Layer w20: v1(790,1814) SW1.7@840,1814
  Bottom Layer w20: v1(790,1814) 800.35,1814 814.35,1800 R4.2
NetR5_2: R5.2 SW1.6 | length 254.2
  Top Layer w20: v1(789,1864) 789.5,1864.5 854.5,1864.5 SW1.6
  Bottom Layer w20: v1(789,1864) 789.96,1864.96 956.93,1864.96 967.6,1875.63 R5.2
NetR7_2: R7.2 SW1.5 | length 266.9
  Top Layer w20: v1(790,1913) 790.96,1913.96 853.96,1913.96 SW1.5
  Bottom Layer w20: v1(790,1913) 920.6,1913 950.04,1942.44 956.93,1942.44 967.6,1953.11 R7.2
PPS: GPS.9 PPS.1 U2.24 | length 1573.9
  Top Layer w10: 1535,1150 1535,1206.46 U2.24
  Top Layer w20: GPS.9 1460,130 1580,250 v1(1580,380) ; 1535,1150 1535,1000.84 v1(1535.34,1000.5)
  Bottom Layer w20: PPS.1 1150.75,311.34 1188.66,311.34 1244,256 1244,206.8 1282.32,168.49 1282.32,162.83 1300,145.15 GPS.9 ; v1(1535.34,1000.5) 1535.34,984.66 1580,940 v1(1580,380)
PWR: C1.2 C2.1 C3.1 C4.1 C5.1 C6.2 C7.2 C8.2 C9.2 D1.1 F1.2 GPS.8 IMU.1 J2.1 J3.3 R6.2 R9.2 R10.2 R11.2 R12.2 R13.2 R14.2 U1.3 U2.11 U2.26 U2.50 U2.56 VCC.1 Y1.1 Y1.4 | length 3117.5
  Top Layer w10: v1(1243,1358) 1270.79,1385.79 U2.11 ; U2.56 1555.62,1664.16 1555.62,1759.62 v1@1564,1768 ; v1(1570,1270) 1570,1265.94 1574.53,1261.41 U2.26 ; v1(1652,1570) 1652,1593.8 1672.17,1613.97 1672.17,1662.6 U2.50
  Top Layer w20: v1@1564,1768 1564,1768.67 1571.39,1776.06 1624.57,1776.06 C7.2@1628.5,1780 ; U1.3 2165,1700 2205,1740 2205,1775 2285,1855 D1.1
  Bottom Layer w20: R10.2 R10.2@695.5,136.25 ; v1(696,202) 695.5,201.5 R10.2@695.5,136.25 ; IMU.1 765,953.54 903.5,1092.05 C8.2@903.5,1095 ; C8.2@905,1112.05 C8.2@905,1115 ; R14.2 969.9,1332.5 969.9,1277.5 ; R13.2 969.9,1222.5 969.9,1277.5 ; v1(1032,1257) 1031.33,1257 1010.83,1277.5 969.9,1277.5 ; v1(1105,205) 1104.34,204.34 1104.34,140.07 R11.2 1101.85,137.58 696.83,137.58 R10.2@695.5,136.25 ; C5.1@1486.5,1365 1502.09,1380.59 1502.09,1400.51 v1(1547.62,1446.04) ; C3.1@1486.61,1510 1486.61,1507.05 v1(1547.62,1446.04) ; Y1.4 Y1.1 ; v1(1570,1270) 1569.04,1270.96 1569.04,1311.47 1547.62,1332.89 v1(1547.62,1446.04) ; C4.1@1605,1365 1589.41,1380.59 1589.41,1404.25 v1(1547.62,1446.04) ; C2.1@1608.62,1510 1608.62,1507.05 v1(1547.62,1446.04) ; v2(2178,1553) 2178,1710.96 2224.45,1710.96 C1.2@2227,1713.5 ; R6.2 2206.89,780 2284.04,702.85 2284.04,695.96 v2(2285,695) ; J2.1 2870.75,549.25 2870.75,460.75 C6.2@2871.5,460
  Bottom Layer w50: GPS.8 1304.97,234.97 1398.52,234.97 1407.05,243.5 C9.2@1410,243.5
  other v1: 1564,1773
PWRIN: F1.1 J1.2
RXD: RXD.1 U1.4 U2.39 | length 552.1
  Top Layer w10: U2.39 1877.47,1405.47 1980,1508
  Top Layer w25: 1980,1508 RXD.1 1989.47,1675 2014.47,1650 U1.4
SCL: IMU.5 R14.1 SCL.1 U2.51 | length 1364.4
  Top Layer w10: v1(1544,1554) 1586.75,1554 1652.49,1619.74 1652.49,1662.6 U2.51
  Top Layer w25: SCL.1 1093.3,1346.7 1093.3,1370.7 1049.5,1414.51 1049.5,1555.92 1090.58,1597 1133.5,1597 1167.5,1631 v1(1179,1631)
  Bottom Layer w10: v1(1179,1631) 1467,1631 v1(1544,1554)
  Bottom Layer w25: IMU.5 767.5,1337.5 890.1,1337.5 R14.1 892.6,1341.89 947.65,1396.94 1033.72,1396.94 1090.66,1340 SCL.1
SDA: IMU.4 R13.1 SDA.1 U2.52 | length 1532.3
  Top Layer w10: v1(1548,1597) 1568.9,1617.9 1625.19,1617.9 1632.8,1625.51 1632.8,1662.6 U2.52
  Top Layer w25: v1(1108,1646) 1092.91,1646 1012,1565.09 1012,1348 1108.3,1251.7 1108.3,1226.7 SDA.1
  Bottom Layer w12: v1(1108,1646) 1137.95,1646 1161.95,1670 1472.72,1670 1545.72,1597 v1(1548,1597)
  Bottom Layer w20: IMU.4 775,1230 887.6,1230 R13.1 897.6,1213.11 936.27,1174.44 1069.44,1174.44 SDA.1
SWCLK: J2.4 R8.2 SWC.1 U2.21 | length 2031.6
  Top Layer w10: U2.21 1476.1,1012.9 1522,967 1731.14,967 1737,972.86 1737,1052 1803,1118 1865.33,1118 1908.33,1075 SWC.1
  Bottom Layer w25: SWC.1 2090,1075 2274.94,890.06 ; R8.2 2282.6,882.4 2274.94,890.06 ; J2.4 2440,600 2274.94,765.06 2274.94,890.06
SWDIO: J2.2 R6.1 SIO.1 U2.20 | length 2020.8
  Top Layer w10: U2.20 1456.42,1007.13 1514.54,949 1738.6,949 1785.52,995.92 1785.52,1015.52 1835.4,1065.4 SIO.1@1845,1065.4
  Bottom Layer w25: SIO.1 1900,1020 2075,1020 2196.67,898.33 2196.67,858.13 R6.1 2193.11,854.8 2151.94,813.63 2151.94,750.84 2352.78,550 J2.2
TXD: TXD.1 U1.1 U2.40 | length 635.8
  Top Layer w10: U2.40 1846.16,1425.16 1919.24,1498.24
  Top Layer w25: 1919.24,1498.24 1919.24,1685.65 1938.5,1704.92 1938.5,1754.03 1980,1795.53 TXD.1 1984.31,1800.69 2104.98,1800.69 U1.1
"UART In": GPS.5 RX.1 U2.2 | length 1867.6
  Top Layer w10: 1241.05,1562.95 U2.2
  Top Layer w12: RX.1 1109.18,1544.18 1146.96,1544.18 1171.77,1569 1235,1569 1241.05,1562.95
  Bottom Layer w12: RX.1 1170,1465 1170,1203.58 1168.43,1202.01
  Bottom Layer w25: 1168.43,1202.01 1006.42,1040 931.1,1040 878.43,987.33 878.43,593.86 1004.3,468 1238,468 GPS.5
"UART Out": GPS.6 TX.1 U2.3 | length 1703.9
  Top Layer w10: 1247.95,1523.57 1267.65,1543.27 U2.3
  Top Layer w12: TX.1 1191.43,1523.57 1247.95,1523.57
  Top Layer w25: v1(1182,516) 1214,516 GPS.6
  Bottom Layer w12: TX.1 1190,1217.91 1210.5,1197.41
  Bottom Layer w25: v1(1182,516) 1113.98,516 1098.98,501 1017.97,501 911.43,607.53 911.43,973.66 942.77,1005 1018.09,1005 1210.5,1197.41
VBAT: GPS.3 U2.5 VBAT.1 | length 1258.4
  Top Layer w10: v1@1263.64,1488 1278.76,1503.12 1315.84,1503.12 U2.5
  Top Layer w25: VBAT.1@1150,420 1143.5,426.5 1143.5,573.5 GPS.3 1358.5,788.5 1358.5,1020.83 1340,1039.33 v1(1340,1045)
  Bottom Layer w10: v1(1255.52,1484.48) 1255.52,1480.42 1315,1420.94 1315,1075.86 1340,1050.86 v1(1340,1045)
XRES: R2.1 U2.47 | length 1146.6
  Top Layer w10: v1(1225,1125) 1229.06,1125 1245.25,1141.19 1331.41,1141.19 1342.61,1130 v1(1425,1130) ; U2.47 1774.16,1562.17 1811.24,1562.17 1845,1528.42 v1(1845,1495) ; v1(1850.97,1225.97) 1851.77,1226.77 v1(1851.77,1321.61)
  Bottom Layer w10: v1(1225,1125) 1225,1057.4 R2.1 ; v1(1425,1130) 1755,1130 v1(1850.97,1225.97) ; v1(1845,1495) 1845,1490.94 1851.72,1484.23 1851.72,1321.67 v1(1851.77,1321.61)
XRES1: C11.1 J2.10 R2.2 S1.2a S1.2b | length 2344.7
  Top Layer w20: v1(1399,979) 1628,750 v1(2418,750)
  Bottom Layer w20: C11.1 1060.91,544.13 1138.58,621.81 S1.2a S1.2b ; R2.2 1157.6,982.52 1138.58,963.5 S1.2b ; v1(1399,979) 1397.65,979 1390.65,986 1252.69,986 1219.64,952.95 S1.2b ; v1(2418,750) J2.10
pads on no net: GPS.1 GPS.2 GPS.4 IMU.2 IMU.7 IMU.8 IMU.9 IMU.10 J1.1 J1.5 J1.7 J1.9 J1.11 J1.13 J1.15 J2.6 J2.7 J2.8 J3.4 P1.3 U1.5 U1.8 U2.1 U2.4 U2.6 U2.7 U2.8 U2.12 U2.13 U2.14 U2.15 U2.16 U2.18 U2.19 U2.22 U2.23 U2.25 U2.27 U2.29 U2.31 U2.33 U2.34 U2.35 U2.36 U2.41 U2.42 U2.43 U2.44 U2.46 U2.53 U2.54 U2.55 U2.62 U2.63 U2.64
copper on no net:
  other v3: 150,150 2850,150 150,1850 2850,1850
  other v4: 115,765 715,765 115,1615 715,1615
  other v5: 2460,130 2460,930

## Polygon pours and split planes (outlines as drawn)
PWR on Top Layer "PWR_L01_P002" (solid, remove dead copper, pour order 2): 212.59,15 2915.08,15 ccw(c2842.21,155.37) 2975,241.28 2975,1728.17 ccw(c2822.79,1819.63) 2822.79,1997.21 127.21,1997.21 ccw(c127.21,1870.37) 25,1795.25 25,208.38 ccw(c144.46,136.59)
PWRIN on Top Layer "PWRIN_L01_P001" (solid, remove dead copper, pour order 1): 2535,1745 2535,1525 2670,1525 2730,1585 2735,1580 2920,1580 2920,1735 2925,1740 2900,1765 2555,1765
GND on Bottom Layer "GND_L02_P000" (solid, remove dead copper, pour order 0): 262.46,20 2794.29,20 ccw(c2865,135) 2975,213.26 2975,1728.49 ccw(c2820,1820) 2728.49,1975 226.39,1975 ccw(c145,1855) 35,1760.53 35,286.65 ccw(c180,180)

## Silkscreen, mask and mechanical layers (free items; w line width, h text height)
Top Overlay:
  drawing of 86 lines, arcs and shapes, not listed
Bottom Overlay:
  text "Christian Gordon" at 2370,445 h60
  text "IMU Board" at 2370,352.5 h60
  text "REV1" at 2370,260 h60

## Text inside footprints (layer, text, board x,y; h text height)
U2: Top Overlay "64" at 1380,1707 h19.68; Top Overlay "49" at 1681,1707 h19.68; Top Overlay "48" at 1818,1573 h19.68; Top Overlay "33" at 1819,1275 h19.68; Top Overlay "32" at 1683,1143 h19.68; Top Overlay "17" at 1376,1141 h19.68; Top Overlay "16" at 1247.35,1276.13 h19.68